# EAGLE board JoystickConnector_v11 (EAGLE 9.7.0)
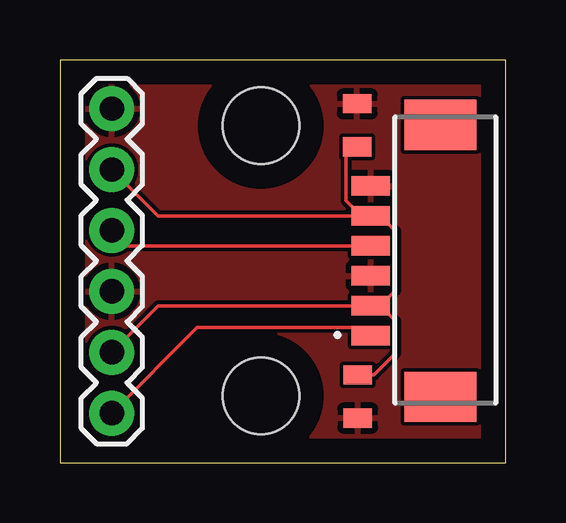
[diagram p0: board, top side]
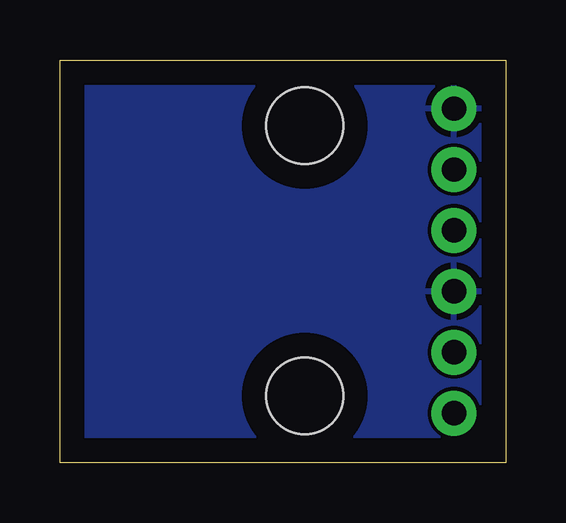
[diagram p1: board, bottom side, seen from below]

Size 18.59 x 16.8 mm. Coordinates in mm from the lower left corner, seen from the top.
Outline: 0,0 18.59,0 18.59,16.8 0,16.8 0,0
Copper layers (1*16): Top 0.035mm / dielectric 1.5mm / Bottom 0.035mm
Design rules "default": minimum track width 6mil, minimum drill 0.35mm, track to track 6mil, track to pad 6mil, pad to pad 6mil, via to via 6mil, smd to smd 6mil, copper to edge 40mil, drill to drill 6mil, minimum pad ring 10mil, minimum via ring 8mil, stop-mask expansion 4mil, vias tented up to drill 0mil, thermal gap 10mil
Holes 3.2 mm at 8.38,14.06 8.38,2.79

## Footprints (pad centres in the part's own frame; a part is rotated, then mirrored left to right if it is on the bottom)
0805 = smd 0.8 x 1.2: 1 -0.9,0; 2 0.9,0
1X06 = drill 1.016 pad 1.88: 1 0,0; 2 2.54,0; 3 5.08,0; 4 7.62,0; 5 10.16,0; 6 12.7,0
0532610671 = smd 0.8 x 1.6: 1 -3.125,1.004; 2 -1.875,1.004; 3 -0.625,1.004; 4 0.625,1.004; 5 1.875,1.004; 6 3.125,1.004 | smd 2.1 x 3: 7 -5.675,-1.896; 8 5.675,-1.896

## Placement (x,y rotation side)
C1  10uF  [0805]  12.42,2.77 270 top
C2  10uF  [0805]  12.4,14.08 90 top
J1  [1X06]  2.16,2.07 90 top
JST_CONNECTOR  0532610671  [0532610671]  13.97,8.43 90 top

## Library data of the parts
C1 C2 = SparkFun-Capacitors; PROD_ID: CAP-11330
J1 = SparkFun-Connectors; PROD_ID: CONN-08437
JST_CONNECTOR = 0532610671; ARROW_PART_NUMBER: 0532610671; ARROW_PRICE-STOCK: https://www.arrow.com/en/products/0532610671/molex?region=europe; DESCRIPTION: 1.25mm Pitch PicoBlade Header, Surface Mount, Right Angle, 6 Circuits; HEIGHT: mm; MANUFACTURER_NAME: Molex; MANUFACTURER_PART_NUMBER: 0532610671; MOUSER_PART_NUMBER: N/A; MOUSER_PRICE-STOCK: https://www.mouser.co.uk/ProductDetail/Molex/0532610671?qs=PBcRNPEHKspfA5Wux0sJoA%3D%3D

## Nets
GND: C1.2 C2.2 J1.3 J1.6 JST_CONNECTOR.3 JST_CONNECTOR.6
SIG_1: J1.1 JST_CONNECTOR.1
SIG_2: J1.4 JST_CONNECTOR.4
VCC: C1.1 C2.1 J1.2 J1.5 JST_CONNECTOR.2 JST_CONNECTOR.5

## Tracks (layer width: path | path; a pad name or v marks a point on that pad's centre or on a via)
GND
  pour Top: 0.2,0.13 18.47,0.13 18.47,16.61 0.2,16.61
  pour Bottom: 0.2,0.13 18.47,0.13 18.47,16.61 0.2,16.61
SIG_1
  Top 0.152: JST_CONNECTOR.1 12.63,5.64 5.72,5.64 J1.1
SIG_2
  Top 0.152: JST_CONNECTOR.4 2.8,9.05 J1.4
VCC
  Top 0.152: JST_CONNECTOR.2 4.1,6.55 J1.2 | JST_CONNECTOR.5 4.09,10.3 J1.5 | JST_CONNECTOR.2 13.37,6.55 | 13.37,6.55 13.99,5.92 13.99,4.57 13.1,3.67 C1.1 | C2.1 12.2,13.18 11.94,12.92 11.94,10.93 12.57,10.3 JST_CONNECTOR.5 | JST_CONNECTOR.5 13.37,10.3 13.99,9.67 13.99,7.18 13.37,6.55 | 13.37,6.55 JST_CONNECTOR.2